# Altium PCB PCB_Program Counter - 1.0_2021-10-28.pcbdoc
Units mm, origin at the board's own origin, x right, y up, seen from the top; angles counter-clockwise.
Board outline 98.04 x 84.07 mm, 2 copper layers (Top Layer, Bottom Layer); 17 components, 31 nets, 75 pads, 11 vias.
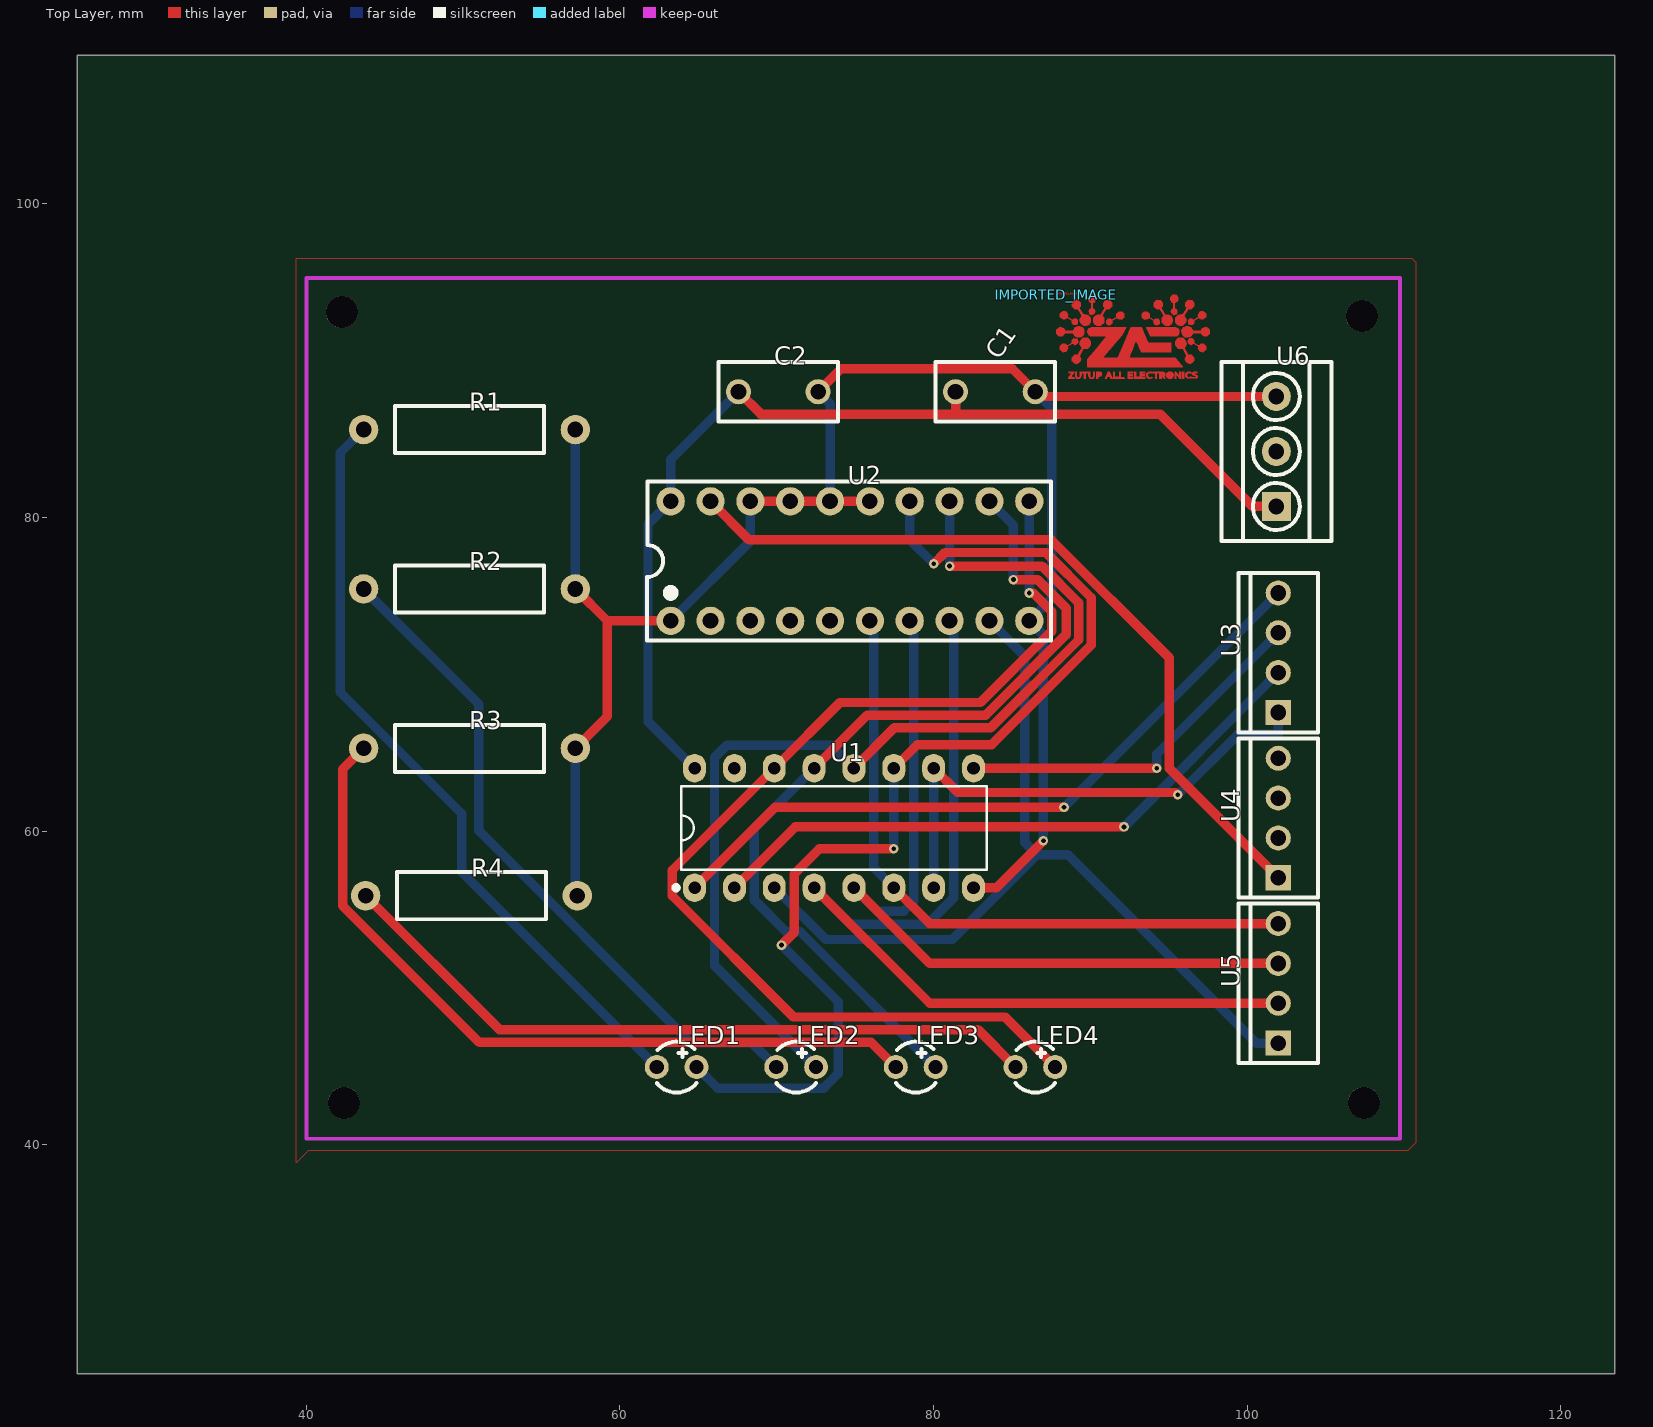
[diagram p0: Top Layer view]
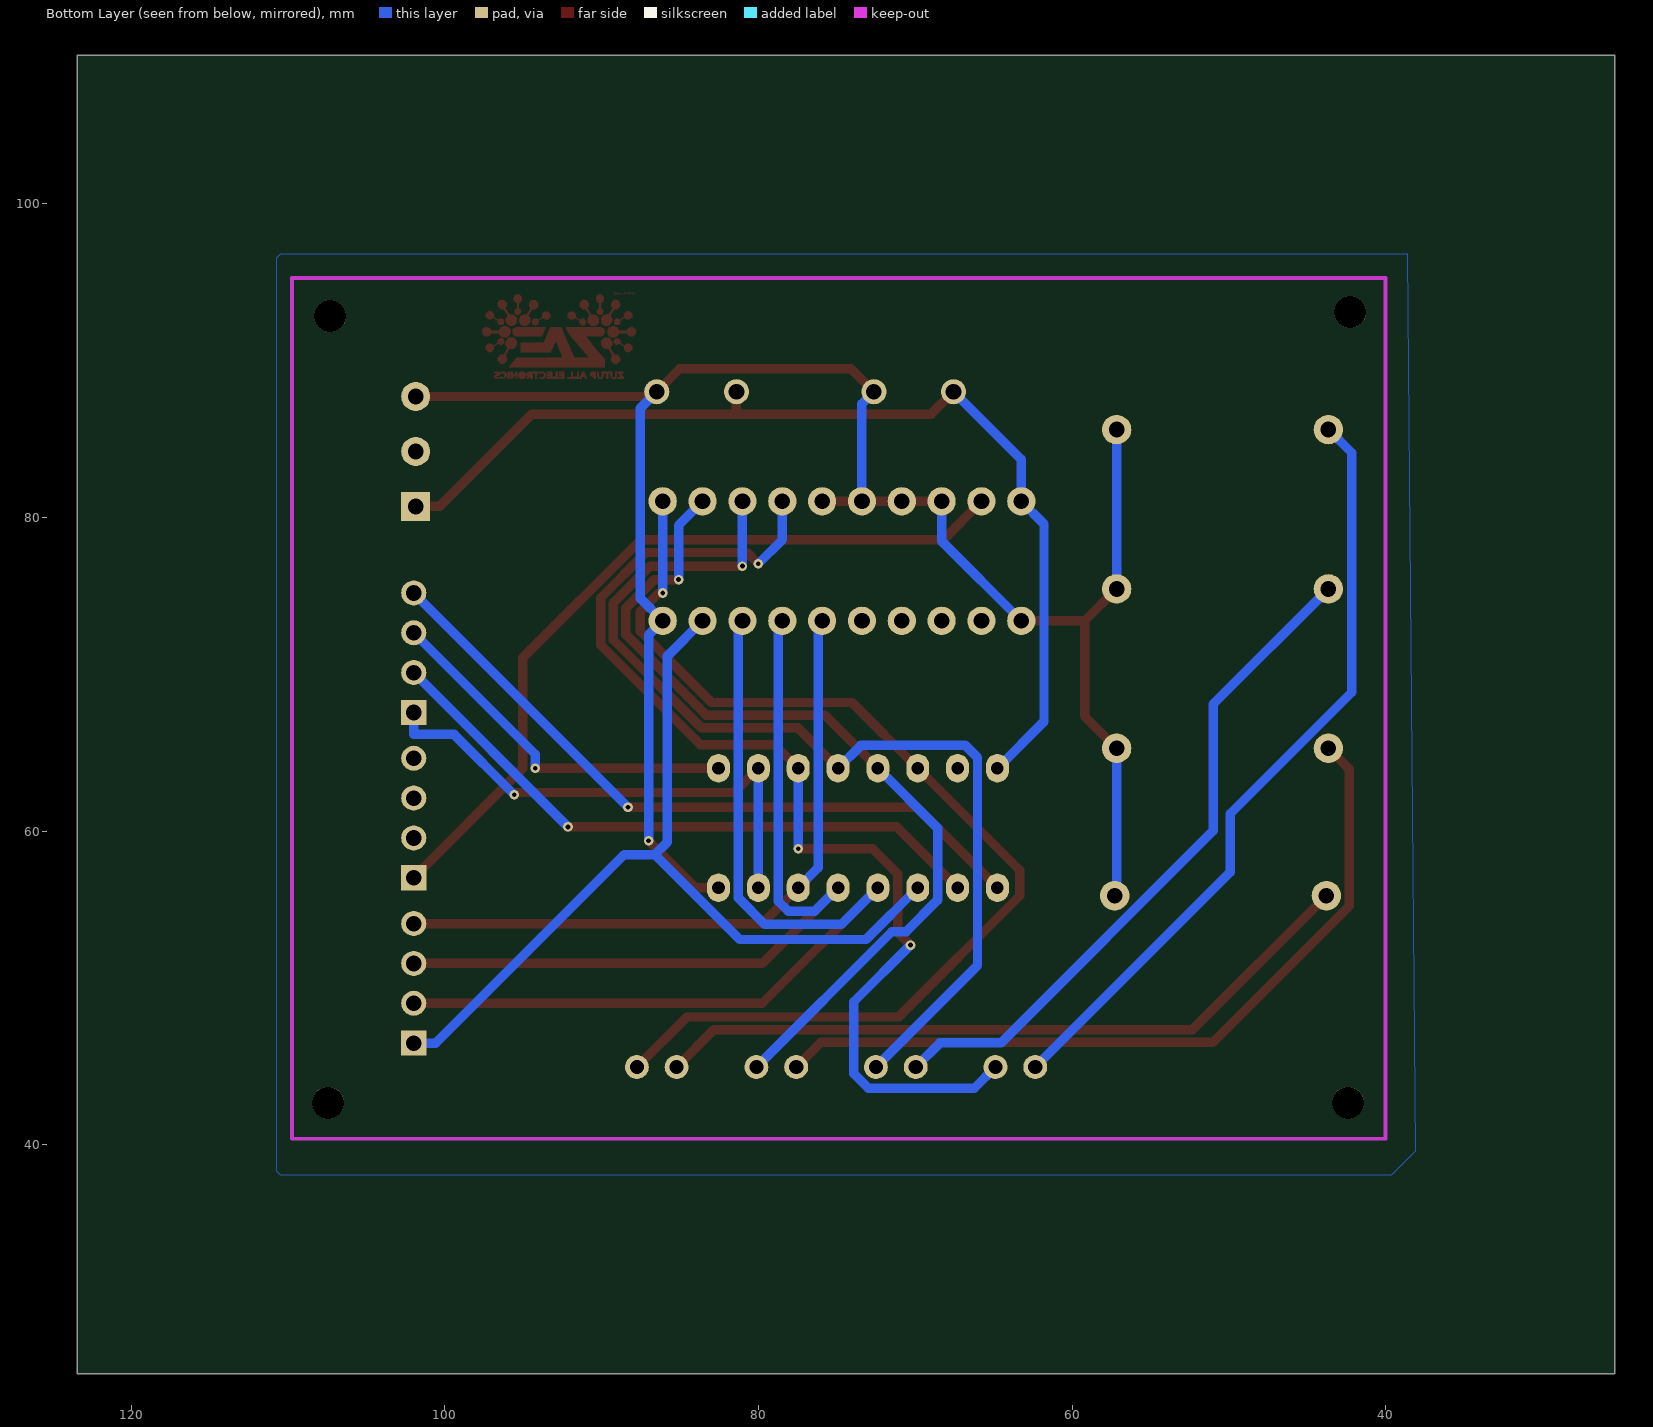
[diagram p1: Bottom Layer view, seen from below]

## Layer stack, top to bottom
Top Layer: signal copper (thickness not stored)
Dielectric: dielectric 0.32, FR-4, Dk 4.8
Bottom Layer: signal copper (thickness not stored)

## Board outline
123.444,25.4 25.4,25.4 25.4,109.474 123.444,109.474

## Components (designator, comment, footprint, x,y, rotation, side; value= is the part's Value field where it differs from the comment)
C1 "100nF 63V" CAP-TH_L7.6-W3.8-P5.08-D0.51 83.947,88.011 r0 top
C2 "100nF 63V" CAP-TH_L7.6-W3.8-P5.08-D0.51 70.104,88.011 r0 top
IMPORTED_IMAGE "IMPORTED_IMAGE" IMPORTED_IMAGE 87.822,94.177 r0 top
LED1 "VERDE" LED-TH_BD3.0-P2.54-RD-GREEN 63.627,44.958 r0 top
LED2 "VERDE" LED-TH_BD3.0-P2.54-RD-GREEN 71.247,44.958 r0 top
LED3 "VERDE" LED-TH_BD3.0-P2.54-RD-GREEN 78.867,44.958 r0 top
LED4 "VERDE" LED-TH_BD3.0-P2.54-RD-GREEN 86.487,44.958 r0 top
R1 "470" RES-TH_BD3.0-L9.5-P13.50-D0.6 50.419,85.598 r0 top
R2 "470" RES-TH_BD3.0-L9.5-P13.50-D0.6 50.419,75.438 r0 top
R3 "470" RES-TH_BD3.0-L9.5-P13.50-D0.6 50.419,65.278 r0 top
R4 "470" RES-TH_BD3.0-L9.5-P13.50-D0.6 50.546,55.88 r0 top
U1 "XD74LS161" DIP-16_L19.2-W6.6-P2.54-LS7.6-BL 73.66,60.198 r0 top
U2 "SN74LS245N" DIP-20_L25.5-W10.0-P2.54-LS7.6-BL 74.676,77.216 r0 top
U3 "SINAIS IN" HDR-TH_4P-P2.54-D1.0 101.981,71.374 r90 top
U4 "171825-4" HDR-TH_4P-P2.54-D1.0 101.981,60.833 r90 top
U5 "BUS" HDR-TH_4P-P2.54-D1.0 101.981,50.292 r90 top
U6 "GS012-3.5-3P" H3-3.5-11.5X7.0MM 101.854,84.201 r0 top

## Footprints (in the part's own frame and the unit in brackets; to place one, negate y for a bottom-side part, rotate by r counter-clockwise, add the part's x,y. Pads: shape width x height; smd on the part's side, far side on the other; paste and mask are expansions set on the pad)
CAP-TH_L7.6-W3.8-P5.08-D0.51 [mm]
  round 1.6 hole 1: 1(-2.54,0) 2(2.54,0)
  silkscreen extent -3.81,-1.91 3.81,1.91
DIP-16_L19.2-W6.6-P2.54-LS7.6-BL [mm]
  oval 1.46x1.825 hole 0.8: 1(-8.89,-3.81) 2(-6.35,-3.81) 3(-3.81,-3.81) 4(-1.27,-3.81) 5(1.27,-3.81) 6(3.81,-3.81) 7(6.35,-3.81) 8(8.89,-3.81) 9(8.89,3.81) 10(6.35,3.81) 11(3.81,3.81) 12(1.27,3.81) 13(-1.27,3.81) 14(-3.81,3.81) 15(-6.35,3.81) 16(-8.89,3.81)
  silkscreen extent -10.22,-3.96 9.73,2.67
DIP-20_L25.5-W10.0-P2.54-LS7.6-BL [mm]
  round 1.8 hole 1: 1(-11.43,-3.81) 2(-8.89,-3.81) 3(-6.35,-3.81) 4(-3.81,-3.81) 5(-1.27,-3.81) 6(1.27,-3.81) 7(3.81,-3.81) 8(6.35,-3.81) 9(8.89,-3.81) 10(11.43,-3.81) 11(11.43,3.81) 12(8.89,3.81) 13(6.35,3.81) 14(3.81,3.81) 15(1.27,3.81) 16(-1.27,3.81) 17(-3.81,3.81) 18(-6.35,3.81) 19(-8.89,3.81) 20(-11.43,3.81)
  silkscreen extent -12.95,-5.08 12.83,5.08
H3-3.5-11.5X7.0MM [mil]
  rect 72.8x72.8 hole 39.4: 1(0,-138)
  round 72.8 hole 39.4: 2(0,0) 3(0,138)
  silkscreen extent -138,-225 138,225
HDR-TH_4P-P2.54-D1.0 [mm]
  rect 1.6x1.6 hole 1: 1(-3.81,0)
  round 1.6 hole 1: 2(-1.27,0) 3(1.27,0) 4(3.81,0)
  silkscreen extent -5.08,-2.54 5.08,2.54
IMPORTED_IMAGE [mm]
  Top Layer region: 1.168,-5.287 1.183,-5.331 0.762,-5.331 0.762,-5.297 0.762,-5.293 0.764,-5.288 0.766,-5.282 0.77,-5.275 0.774,-5.267 0.779,-5.258 0.785,-5.249 0.792,-5.239 0.799,-5.228 0.807,-5.217 0.816,-5.206 0.825,-5.194 0.835,-5.182 0.844,-5.17 0.855,-5.158 0.865,-5.146 0.888,-5.12 0.907,-5.097 0.923,-5.077 0.937,-5.06 0.948,-5.045 0.955,-5.031 0.961,-5.02 0.963,-5.011 0.962,-5.004 0.959,-4.998 0.953,-4.993 0.944,-4.99 0.933,-4.987 0.919,-4.986 0.902,-4.985 0.883,-4.985 0.796,-4.985 0.796,-4.881 1.142,-4.881 1.142,-4.93 1.142,-4.936 1.141,-4.942 1.138,-4.949 1.135,-4.957 1.132,-4.966 1.127,-4.975 1.122,-4.985 1.117,-4.995 1.111,-5.005 1.104,-5.016 1.097,-5.027 1.089,-5.038 1.081,-5.049 1.073,-5.06 1.065,-5.071 1.056,-5.082 1.037,-5.105 1.02,-5.125 1.006,-5.143 0.995,-5.158 0.986,-5.171 0.98,-5.183 0.977,-5.193 0.976,-5.201 0.977,-5.208 0.981,-5.213 0.988,-5.218 0.998,-5.222 1.01,-5.225 1.024,-5.228 1.042,-5.231 1.062,-5.233 1.154,-5.244
  Top Layer region: 2.561,-5.331 2.561,-4.881 2.663,-4.881 2.687,-4.881 2.711,-4.882 2.732,-4.884 2.753,-4.887 2.772,-4.89 2.79,-4.894 2.806,-4.899 2.822,-4.906 2.836,-4.912 2.849,-4.92 2.862,-4.929 2.873,-4.939 2.883,-4.95 2.893,-4.962 2.902,-4.975 2.91,-4.989 2.945,-5.054 2.874,-5.187 2.769,-5.209 2.665,-5.232 2.665,-5.331 hole: 904787.686,891109.527 904787.686,890391.723 904787.686,890391.723 905991.392,890623.625 905991.392,890623.625 906223.04,891827.077 906223.04,891827.077 904787.686,891827.077 904787.686,891827.077 904787.686,891109.527
  Top Layer region: 1.869,-5.158 1.869,-5.331 1.765,-5.331 1.765,-4.985 1.636,-4.985 1.616,-5.109 1.611,-5.135 1.605,-5.161 1.598,-5.186 1.59,-5.211 1.581,-5.233 1.572,-5.253 1.564,-5.27 1.555,-5.282 1.515,-5.331 1.283,-5.331 1.212,-5.197 1.212,-4.881 1.315,-4.881 1.315,-5.184 1.416,-5.267 1.452,-5.245 1.488,-5.223 1.488,-4.881 2.008,-4.881 2.008,-4.985 1.869,-4.985
  Top Layer region: 6.715,-5.279 6.715,-5.331 6.577,-5.331 6.577,-4.881 6.824,-4.881 6.958,-4.952 6.958,-5.154 6.882,-5.2 6.92,-5.238 6.935,-5.254 6.947,-5.272 6.955,-5.289 6.958,-5.303 6.957,-5.311 6.953,-5.318 6.949,-5.323 6.942,-5.327 6.935,-5.329 6.926,-5.33 6.916,-5.33 6.905,-5.329 6.894,-5.327 6.883,-5.323 6.871,-5.318 6.86,-5.312 6.849,-5.305 6.838,-5.297 6.828,-5.289 6.819,-5.279 6.8,-5.259 6.78,-5.242 6.761,-5.231 6.746,-5.227 6.715,-5.227 hole: 945287.224,891134.927 945287.224,890391.723 945287.224,890391.723 945892.76,890508.563 945892.76,890508.563 946498.55,890625.149 946498.55,890625.149 946498.55,891644.705 946498.55,891644.705 945287.224,891877.877 945287.224,891877.877 945287.224,891134.927
  Top Layer region: 5.296,-5.279 5.296,-5.331 4.985,-5.331 4.985,-4.881 5.088,-4.881 5.088,-5.227 5.296,-5.227
  Top Layer region: 2.422,-5.264 2.386,-5.331 2.15,-5.331 2.096,-5.254 2.042,-5.177 2.042,-4.881 2.181,-4.881 2.181,-5.223 2.253,-5.267 2.354,-5.184 2.354,-4.881 2.458,-4.881 2.458,-5.197
  Top Layer region: 7.961,-5.106 7.961,-5.331 7.863,-5.331 7.65,-5.073 7.65,-5.331 7.546,-5.331 7.546,-4.881 7.633,-4.881 7.744,-5.011 7.855,-5.14 7.856,-5.011 7.858,-4.881 7.961,-4.881
  Top Layer region: 3.635,-5.331 3.635,-4.881 3.738,-4.881 3.738,-5.227 3.981,-5.227 3.981,-5.331
  Top Layer region: 7.136,-5.331 7.027,-5.222 7.027,-5.007 7.084,-4.944 7.141,-4.881 7.362,-4.881 7.416,-4.941 7.432,-4.96 7.446,-4.981 7.457,-5.002 7.467,-5.023 7.474,-5.046 7.48,-5.068 7.483,-5.091 7.484,-5.114 7.484,-5.137 7.481,-5.159 7.477,-5.181 7.47,-5.202 7.461,-5.222 7.45,-5.242 7.437,-5.26 7.422,-5.276 7.368,-5.331 hole: 949957.014,889536.759 950574.996,889084.893 950574.996,889084.893 951240.222,889440.747 951240.222,889440.747 951905.448,889796.855 951905.448,889796.855 951798.26,890725.479 951798.26,890725.479 951690.818,891654.103 951690.818,891654.103 950751.018,891762.561 950751.018,891762.561 949811.218,891870.765 949811.218,891870.765 949338.778,889988.625 949338.778,889988.625 949957.014,889536.759
  Top Layer region: 5.873,-5.331 5.809,-5.273 5.746,-5.216 5.746,-4.988 5.823,-4.935 5.9,-4.881 6.078,-4.881 6.161,-4.964 6.161,-4.881 6.542,-4.881 6.542,-4.985 6.404,-4.985 6.404,-5.331 6.3,-5.331 6.3,-4.991 5.889,-4.991 5.848,-5.098 5.887,-5.22 5.997,-5.263 6.037,-5.229 6.077,-5.196 6.179,-5.261 6.127,-5.296 6.114,-5.302 6.099,-5.309 6.081,-5.315 6.06,-5.32 6.039,-5.324 6.017,-5.327 5.995,-5.329 5.974,-5.33
  Top Layer region: 8.031,-5.331 8.031,-4.881 8.169,-4.881 8.169,-5.331
  Top Layer region: 5.331,-5.331 5.331,-4.881 5.677,-4.881 5.677,-4.985 5.469,-4.985 5.469,-5.054 5.683,-5.054 5.668,-5.097 5.654,-5.14 5.562,-5.151 5.469,-5.162 5.469,-5.227 5.677,-5.227 5.677,-5.331
  Top Layer region: 3.108,-5.331 3.131,-5.275 3.168,-5.188 3.213,-5.081 3.298,-4.881 3.414,-4.881 3.516,-5.119 3.594,-5.304 3.606,-5.331 3.461,-5.331 3.461,-5.227 3.261,-5.227 3.221,-5.331 hole: 911364.508,890615.751 911364.508,890096.321 911364.508,890096.321 912056.912,890096.321 912056.912,890096.321 912056.912,891134.927 912056.912,891134.927 911364.508,891134.927 911364.508,891134.927 911364.508,890615.751
  Top Layer region: 4.915,-5.279 4.915,-5.331 4.569,-5.331 4.569,-4.881 4.915,-4.881 4.915,-4.985 4.673,-4.985 4.673,-5.054 4.881,-5.054 4.881,-5.158 4.673,-5.158 4.673,-5.227 4.915,-5.227
  Top Layer region: 4.015,-5.331 4.015,-4.881 4.119,-4.881 4.119,-5.222 4.339,-5.244 4.367,-5.331
  Top Layer region: 9.002,-5.276 8.961,-5.325 8.34,-5.323 8.238,-5.222 8.238,-5.007 8.296,-4.944 8.353,-4.881 8.576,-4.881 8.653,-4.974 8.611,-5.016 8.404,-4.974 8.374,-5.023 8.368,-5.034 8.362,-5.046 8.357,-5.06 8.352,-5.074 8.348,-5.089 8.345,-5.104 8.343,-5.118 8.343,-5.13 8.342,-5.19 8.485,-5.266 8.574,-5.193 8.598,-5.217 8.601,-5.219 8.605,-5.222 8.611,-5.224 8.618,-5.227 8.626,-5.229 8.634,-5.231 8.644,-5.234 8.655,-5.236 8.666,-5.238 8.678,-5.24 8.691,-5.242 8.704,-5.243 8.717,-5.245 8.731,-5.246 8.745,-5.247 8.759,-5.248 8.896,-5.255 8.931,-5.198 8.813,-5.159 8.694,-5.12 8.675,-5.069 8.656,-5.019 8.696,-4.915 8.776,-4.895 8.793,-4.891 8.812,-4.888 8.831,-4.885 8.85,-4.884 8.869,-4.883 8.887,-4.883 8.903,-4.884 8.916,-4.886 8.977,-4.898 8.991,-4.941 9.006,-4.985 8.792,-4.985 8.792,-5.012 8.794,-5.018 8.8,-5.025 8.81,-5.033 8.823,-5.042 8.838,-5.051 8.856,-5.06 8.875,-5.069 8.896,-5.078 9,-5.117 9.042,-5.228
  Top Layer region: 1.973,-4.604 1.975,-4.102 2.579,-3.392 2.7,-3.249 2.813,-3.115 2.916,-2.992 3.005,-2.883 3.079,-2.793 3.135,-2.723 3.171,-2.676 3.183,-2.657 3.185,-2.631 2.158,-2.631 2.087,-2.553 2.072,-2.536 2.057,-2.517 2.043,-2.496 2.03,-2.475 2.018,-2.455 2.007,-2.435 1.999,-2.416 1.993,-2.399 1.969,-2.323 2.025,-2.215 2.081,-2.108 2.157,-2.077 2.233,-2.047 3.349,-2.044 3.573,-2.044 3.782,-2.045 3.972,-2.046 4.137,-2.048 4.274,-2.051 4.377,-2.054 4.443,-2.057 4.465,-2.06 4.464,-2.066 4.459,-2.078 4.452,-2.095 4.442,-2.116 4.43,-2.142 4.415,-2.172 4.399,-2.205 4.382,-2.241 4.363,-2.279 4.343,-2.319 4.329,-2.346 4.192,-2.613 3.585,-3.298 3.462,-3.436 3.349,-3.566 3.245,-3.684 3.155,-3.787 3.081,-3.873 3.025,-3.939 2.989,-3.982 2.977,-3.999 2.979,-4.001 2.987,-4.003 2.998,-4.004 3.014,-4.006 3.035,-4.007 3.059,-4.008 3.086,-4.01 3.117,-4.011 3.151,-4.012 3.188,-4.013 3.227,-4.013 3.269,-4.014 3.312,-4.015 3.358,-4.015 3.405,-4.015 3.454,-4.015 3.931,-4.015 4.345,-3.029 4.76,-2.043 5.107,-2.043 5.454,-2.042 5.661,-2.536 5.868,-3.029 7.338,-3.047 7.338,-3.635 5.411,-3.635 5.261,-3.288 5.231,-3.219 5.201,-3.154 5.174,-3.095 5.149,-3.044 5.127,-3.002 5.108,-2.97 5.095,-2.949 5.087,-2.942 5.079,-2.954 5.063,-2.986 5.041,-3.035 5.014,-3.1 4.982,-3.177 4.947,-3.263 4.91,-3.355 4.872,-3.451 4.835,-3.547 4.799,-3.642 4.765,-3.731 4.735,-3.812 4.709,-3.882 4.69,-3.938 4.677,-3.978 4.673,-3.999 4.679,-4 4.696,-4.002 4.724,-4.003 4.768,-4.005 4.826,-4.006 4.895,-4.008 4.975,-4.009 5.066,-4.01 5.167,-4.011 5.277,-4.012 5.395,-4.013 5.52,-4.014 5.652,-4.014 5.79,-4.015 5.915,-4.015 6.043,-4.015 6.137,-4.015 7.601,-4.015 7.833,-4.281 7.88,-4.335 7.923,-4.386 7.963,-4.434 7.997,-4.477 8.025,-4.514 8.047,-4.543 8.06,-4.564 8.065,-4.575 8.065,-4.604
  Top Layer region: 1.312,-4.4 1.236,-4.377 1.219,-4.37 1.2,-4.362 1.18,-4.351 1.159,-4.339 1.138,-4.326 1.118,-4.312 1.099,-4.297 1.082,-4.282 1.004,-4.211 1.004,-3.99 1.076,-3.899 1.147,-3.808 1.381,-3.808 1.5,-3.596 1.619,-3.384 1.55,-3.266 1.481,-3.149 1.525,-2.915 1.706,-2.735 2.013,-2.735 2.114,-2.836 2.215,-2.937 2.215,-3.218 2.116,-3.329 2.017,-3.44 1.725,-3.447 1.613,-3.657 1.502,-3.866 1.603,-4.08 1.558,-4.188 1.513,-4.295 1.413,-4.348
  Top Layer region: 8.48,-4.398 8.381,-4.347 8.283,-4.295 8.238,-4.188 8.193,-4.08 8.244,-3.972 8.295,-3.864 8.061,-3.443 7.781,-3.443 7.581,-3.218 7.581,-2.937 7.682,-2.836 7.783,-2.735 8.09,-2.735 8.269,-2.913 8.291,-3.015 8.314,-3.118 8.247,-3.253 8.179,-3.389 8.297,-3.598 8.415,-3.808 8.649,-3.808 8.72,-3.899 8.792,-3.99 8.792,-4.179 8.723,-4.266 8.655,-4.354 8.567,-4.376
  Top Layer region: 0.425,-3.635 0.334,-3.563 0.242,-3.491 0.242,-3.276 0.393,-3.115 0.573,-3.115 0.715,-3.215 0.859,-3.128 1.004,-3.042 1.004,-2.878 1.06,-2.822 1.116,-2.765 1.224,-2.776 1.332,-2.787 1.425,-2.981 1.317,-3.145 1.179,-3.188 1.106,-3.149 1.032,-3.109 0.88,-3.19 0.728,-3.271 0.765,-3.389 0.713,-3.49 0.66,-3.592 0.604,-3.613 0.592,-3.617 0.578,-3.621 0.562,-3.625 0.546,-3.628 0.53,-3.631 0.515,-3.633 0.5,-3.634 0.486,-3.635
  Top Layer region: 9.462,-3.563 9.371,-3.635 9.31,-3.635 9.296,-3.634 9.281,-3.633 9.265,-3.631 9.249,-3.628 9.234,-3.625 9.218,-3.621 9.204,-3.617 9.192,-3.613 9.136,-3.592 9.083,-3.49 9.031,-3.389 9.05,-3.33 9.068,-3.271 8.916,-3.19 8.764,-3.109 8.69,-3.149 8.616,-3.188 8.548,-3.167 8.479,-3.145 8.427,-3.066 8.375,-2.987 8.399,-2.921 8.404,-2.907 8.41,-2.892 8.418,-2.877 8.425,-2.862 8.433,-2.848 8.441,-2.834 8.448,-2.822 8.456,-2.812 8.489,-2.769 8.683,-2.769 8.738,-2.824 8.792,-2.878 8.792,-3.042 8.937,-3.128 9.081,-3.215 9.152,-3.165 9.223,-3.115 9.393,-3.115 9.554,-3.266 9.554,-3.491
  Top Layer region: 1.311,-2.7 1.178,-2.629 1.124,-2.526 1.071,-2.423 0.584,-2.423 0.497,-2.527 0.409,-2.631 0.17,-2.631 0,-2.461 0,-2.222 0.22,-2.036 0.324,-2.057 0.428,-2.078 0.491,-2.135 0.515,-2.16 0.535,-2.188 0.549,-2.215 0.554,-2.238 0.554,-2.285 1.071,-2.285 1.126,-2.178 1.181,-2.072 1.304,-2.018 1.327,-2.008 1.348,-2 1.357,-1.996 1.366,-1.993 1.374,-1.99 1.382,-1.987 1.39,-1.985 1.398,-1.983 1.405,-1.981 1.412,-1.98 1.418,-1.979 1.425,-1.978 1.432,-1.978 1.438,-1.978 1.445,-1.979 1.452,-1.979 1.459,-1.981 1.466,-1.982 1.473,-1.984 1.481,-1.986 1.489,-1.989 1.497,-1.992 1.506,-1.995 1.525,-2.002 1.547,-2.011 1.572,-2.021 1.687,-2.07 1.8,-2.231 1.8,-2.426 1.748,-2.528 1.695,-2.629 1.629,-2.664 1.562,-2.7
  Top Layer region: 8.552,-2.664 8.485,-2.7 8.208,-2.7 8.026,-2.544 8.007,-2.398 7.987,-2.251 8.046,-2.161 8.105,-2.071 8.228,-2.018 8.251,-2.008 8.271,-2 8.28,-1.996 8.289,-1.993 8.298,-1.99 8.306,-1.987 8.313,-1.985 8.321,-1.983 8.328,-1.981 8.335,-1.98 8.342,-1.979 8.348,-1.978 8.355,-1.978 8.362,-1.978 8.368,-1.979 8.375,-1.98 8.382,-1.981 8.389,-1.982 8.397,-1.984 8.404,-1.986 8.413,-1.989 8.421,-1.992 8.43,-1.995 8.45,-2.003 8.472,-2.012 8.497,-2.022 8.614,-2.071 8.67,-2.178 8.725,-2.285 9.242,-2.285 9.242,-2.238 9.243,-2.228 9.247,-2.215 9.253,-2.202 9.261,-2.188 9.27,-2.174 9.281,-2.16 9.292,-2.147 9.305,-2.135 9.368,-2.078 9.472,-2.057 9.576,-2.036 9.686,-2.129 9.796,-2.222 9.796,-2.461 9.626,-2.631 9.394,-2.631 9.318,-2.56 9.288,-2.53 9.264,-2.501 9.248,-2.475 9.242,-2.456 9.242,-2.423 8.725,-2.423 8.618,-2.629
  Top Layer region: 7.782,-2.551 7.707,-2.631 5.99,-2.631 5.868,-2.366 5.844,-2.313 5.821,-2.261 5.8,-2.214 5.782,-2.171 5.767,-2.134 5.756,-2.104 5.749,-2.083 5.746,-2.072 5.746,-2.042 7.619,-2.042 7.717,-2.093 7.815,-2.144 7.836,-2.2 7.84,-2.213 7.844,-2.23 7.848,-2.249 7.851,-2.271 7.854,-2.294 7.856,-2.317 7.857,-2.34 7.858,-2.363 7.858,-2.471
  Top Layer region: 7.083,-1.972 7.06,-1.973 6.959,-1.973 6.846,-1.872 6.733,-1.771 6.733,-1.461 6.85,-1.331 6.723,-1.115 6.596,-0.9 6.413,-0.9 6.231,-0.757 6.231,-0.481 6.409,-0.303 6.663,-0.344 6.784,-0.492 6.784,-0.748 6.707,-0.825 6.939,-1.246 7.162,-1.246 7.253,-1.288 7.344,-1.329 7.442,-1.52 7.442,-1.7 7.344,-1.89 7.253,-1.932 7.232,-1.94 7.21,-1.948 7.185,-1.955 7.159,-1.961 7.133,-1.966 7.107,-1.97
  Top Layer region: 2.736,-1.973 2.713,-1.972 2.689,-1.97 2.663,-1.966 2.637,-1.961 2.611,-1.955 2.586,-1.948 2.564,-1.94 2.543,-1.932 2.452,-1.89 2.403,-1.795 2.393,-1.773 2.383,-1.751 2.375,-1.729 2.369,-1.707 2.364,-1.684 2.36,-1.662 2.357,-1.639 2.356,-1.617 2.356,-1.594 2.358,-1.572 2.361,-1.549 2.365,-1.526 2.37,-1.504 2.377,-1.481 2.386,-1.458 2.395,-1.436 2.436,-1.345 2.627,-1.246 2.856,-1.245 2.972,-1.034 3.087,-0.824 3.049,-0.786 3.011,-0.748 3.011,-0.515 3.085,-0.377 3.161,-0.346 3.178,-0.34 3.196,-0.334 3.217,-0.329 3.238,-0.324 3.259,-0.32 3.279,-0.317 3.298,-0.315 3.316,-0.314 3.395,-0.312 3.565,-0.481 3.565,-0.757 3.474,-0.828 3.383,-0.9 3.2,-0.9 3.073,-1.115 2.946,-1.331 3.004,-1.396 3.063,-1.461 3.063,-1.771 2.837,-1.973
  Top Layer region: 8.17,-1.874 8.071,-1.973 7.853,-1.973 7.777,-1.934 7.761,-1.925 7.743,-1.914 7.725,-1.9 7.706,-1.885 7.688,-1.87 7.671,-1.854 7.656,-1.838 7.642,-1.822 7.582,-1.748 7.581,-1.606 7.581,-1.464 7.664,-1.374 7.748,-1.284 7.829,-1.266 7.847,-1.262 7.867,-1.258 7.888,-1.254 7.911,-1.251 7.933,-1.247 7.955,-1.244 7.976,-1.241 7.994,-1.239 8.08,-1.229 8.199,-1.028 8.318,-0.827 8.238,-0.748 8.238,-0.481 8.416,-0.303 8.671,-0.344 8.792,-0.492 8.792,-0.73 8.622,-0.9 8.427,-0.9 8.178,-1.321 8.319,-1.578 8.294,-1.676 8.269,-1.774
  Top Layer region: 1.725,-1.973 1.626,-1.874 1.527,-1.774 1.477,-1.578 1.618,-1.321 1.494,-1.111 1.369,-0.9 1.174,-0.9 1.004,-0.73 1.004,-0.622 1.005,-0.599 1.007,-0.575 1.01,-0.55 1.015,-0.526 1.02,-0.503 1.026,-0.481 1.033,-0.462 1.041,-0.446 1.078,-0.377 1.153,-0.346 1.17,-0.34 1.189,-0.334 1.209,-0.329 1.23,-0.324 1.251,-0.32 1.271,-0.317 1.291,-0.315 1.308,-0.314 1.388,-0.312 1.558,-0.481 1.558,-0.748 1.478,-0.827 1.716,-1.229 1.801,-1.239 1.82,-1.241 1.841,-1.244 1.863,-1.247 1.885,-1.251 1.908,-1.254 1.929,-1.258 1.949,-1.262 1.967,-1.266 2.048,-1.284 2.132,-1.374 2.215,-1.464 2.215,-1.606 2.214,-1.748 2.154,-1.822 2.14,-1.838 2.125,-1.854 2.108,-1.87 2.09,-1.885 2.071,-1.9 2.053,-1.914 2.035,-1.925 2.019,-1.934 1.943,-1.973
  Top Layer region: 6.442,-1.944 6.37,-1.921 6.298,-1.899 6.188,-1.731 6.223,-1.64 6.072,-1.56 5.92,-1.479 5.82,-1.562 5.607,-1.568 5.538,-1.506 5.469,-1.443 5.469,-1.2 5.526,-1.136 5.584,-1.073 5.815,-1.073 5.885,-1.142 5.954,-1.212 5.954,-1.415 6.1,-1.503 6.247,-1.59 6.314,-1.523 6.503,-1.523 6.557,-1.577 6.611,-1.632 6.611,-1.833 6.527,-1.889
  Top Layer region: 3.377,-1.935 3.362,-1.933 3.347,-1.93 3.332,-1.925 3.316,-1.918 3.299,-1.909 3.281,-1.898 3.261,-1.885 3.185,-1.831 3.185,-1.632 3.293,-1.523 3.482,-1.523 3.548,-1.587 3.842,-1.412 3.842,-1.212 3.981,-1.073 4.2,-1.073 4.327,-1.188 4.327,-1.443 4.258,-1.506 4.189,-1.568 3.976,-1.562 3.876,-1.479 3.721,-1.561 3.566,-1.644 3.604,-1.764 3.517,-1.851 3.499,-1.869 3.481,-1.885 3.465,-1.898 3.449,-1.91 3.434,-1.919 3.42,-1.926 3.405,-1.931 3.391,-1.934
  Top Layer region: 1.082,-1.904 0.995,-1.8 0.995,-1.638 0.85,-1.551 0.705,-1.463 0.64,-1.51 0.575,-1.558 0.425,-1.558 0.334,-1.486 0.242,-1.414 0.242,-1.182 0.334,-1.11 0.425,-1.038 0.486,-1.038 0.5,-1.039 0.515,-1.04 0.53,-1.042 0.546,-1.045 0.562,-1.048 0.578,-1.052 0.592,-1.056 0.604,-1.06 0.66,-1.081 0.765,-1.284 0.746,-1.343 0.727,-1.403 1.021,-1.579 1.112,-1.527 1.204,-1.475 1.385,-1.594 1.385,-1.821 1.301,-1.904
  Top Layer region: 8.494,-1.904 8.411,-1.821 8.411,-1.594 8.592,-1.475 8.684,-1.527 8.775,-1.579 8.922,-1.491 9.069,-1.403 9.031,-1.284 9.084,-1.182 9.095,-1.161 9.108,-1.141 9.121,-1.122 9.134,-1.104 9.147,-1.089 9.16,-1.077 9.171,-1.067 9.181,-1.062 9.191,-1.058 9.204,-1.055 9.218,-1.051 9.233,-1.048 9.25,-1.046 9.266,-1.044 9.282,-1.042 9.298,-1.041 9.371,-1.038 9.462,-1.11 9.554,-1.182 9.554,-1.414 9.371,-1.558 9.221,-1.558 9.157,-1.511 9.093,-1.464 8.947,-1.546 8.801,-1.628 8.801,-1.8 8.714,-1.904
  Top Layer region: 2.294,-1.283 2.113,-1.214 2.092,-1.129 2.071,-1.043 2.115,-0.904 2.25,-0.861 2.25,-0.485 2.203,-0.485 2.193,-0.483 2.18,-0.479 2.167,-0.473 2.152,-0.464 2.137,-0.454 2.122,-0.442 2.107,-0.429 2.094,-0.415 2.031,-0.345 2.031,-0.139 2.094,-0.07 2.157,0 2.388,0 2.527,-0.138 2.527,-0.331 2.419,-0.485 2.319,-0.485 2.319,-0.865 2.353,-0.865 2.361,-0.867 2.371,-0.872 2.381,-0.88 2.393,-0.89 2.406,-0.903 2.418,-0.917 2.431,-0.933 2.442,-0.95 2.498,-1.035 2.475,-1.107 2.452,-1.179
  Top Layer region: 7.502,-1.283 7.423,-1.231 7.344,-1.179 7.298,-1.035 7.354,-0.95 7.378,-0.917 7.403,-0.89 7.425,-0.872 7.443,-0.865 7.477,-0.865 7.477,-0.485 7.377,-0.485 7.323,-0.408 7.269,-0.331 7.269,-0.138 7.338,-0.069 7.408,0 7.639,0 7.765,-0.139 7.765,-0.345 7.702,-0.415 7.674,-0.442 7.644,-0.464 7.616,-0.479 7.593,-0.485 7.546,-0.485 7.546,-0.861 7.684,-0.905 7.725,-1.068 7.702,-1.142 7.679,-1.215
LED-TH_BD3.0-P2.54-RD-GREEN [mil]
  round 60 hole 35.43: 1(-50,0) 2(50,0)
  silkscreen extent -50,-64 50,64
RES-TH_BD3.0-L9.5-P13.50-D0.6 [mm]
  round 1.88 hole 1: 1(-6.75,0) 2(6.75,0)
  silkscreen extent -4.75,-1.5 4.75,1.5

## Free pads (board coordinates)
  round 2.032 hole 2.032 unplated: ""(42.291,93.091) ""(42.418,42.672) ""(107.315,92.837) ""(107.442,42.672)

## Via types
v1: diameter 0.61, hole 0.305, Top Layer to Bottom Layer, 11 vias

## Nets (pads, with @x,y where several pads share a name; then routed paths per layer and width w, separated by ;. In a path a pad name is that pad's centre, name@x,y a point inside that pad or via, vN(x,y) a via of type N, cw(c..) or ccw(c..) an arc to the next point about the centre after c; other vN are vias at no path point)
+5V: C1.1 C2.1 U1.16 U2.20 U6.1 | length 66.4
  Top Layer w0.6: C2.1 68.994,86.581 81.407,86.581 ; C1.1 81.407,86.581 ; U6.1 100.328,80.696 94.443,86.581 81.407,86.581
  Bottom Layer w0.6: U1.16 61.798,66.98 61.798,79.578 U2.20 63.246,83.693 C2.1
GND: C1.2 C2.2 R1.2 R2.2 R3.2 R4.2 U1.8 U2.1 U2.10 U2.15 U2.16 U2.17 U2.18 U6.3 | length 126.4
  Top Layer w0.6: R3.2@57.169,65.278 59.201,67.31 59.201,73.406 ; R2.2@57.169,75.438 59.201,73.406 ; U2.1 59.201,73.406 ; U2.18 U2.17 U2.16 U2.15 ; C2.2 74.11,89.477 85.021,89.477 C1.2 86.792,87.706 U6.3 ; U1.8 84.013,56.388 v1(87.01,59.385)
  Bottom Layer w0.6: R3.2@57.169,65.278 57.169,56.007 R4.2@57.296,55.88 ; R2.2@57.169,75.438 R1.2@57.169,85.598 ; U2.1 68.326,78.486 U2.18 ; C2.2 73.406,87.249 U2.16 ; C1.2 87.53,86.968 87.53,74.83 U2.10 87.01,72.502 v1(87.01,59.385)
LED1_1: LED1.1 R1.1 | length 49.6
  Bottom Layer w0.6: R1.1 42.185,84.114 42.185,68.856 49.931,61.111 49.931,57.384 LED1.1
LED2_1: LED2.1 R2.1 | length 43.7
  Bottom Layer w0.6: R2.1 51.018,68.089 51.018,60.024 64.542,46.5 68.435,46.5 LED2.1
LED3_1: LED3.1 R3.1 | length 50.1
  Top Layer w0.6: R3.1 42.33,63.939 42.33,55.246 51.034,46.542 76.013,46.542 LED3.1
LED4_1: LED4.1 R4.1 | length 45.9
  Top Layer w0.6: R4.1 52.331,47.345 82.83,47.345 LED4.1
S$31: 
S$33: 
S$35: 
U1_1: U1.1 U3.4 | length 45
  Top Layer w0.6: U1.1 69.904,61.522 v1(88.319,61.522)
  Bottom Layer w0.6: v1(88.319,61.522) U3.4
U1_2: U1.2 U3.2 | length 40.4
  Top Layer w0.6: U1.2 71.192,60.27 v1(92.147,60.27)
  Bottom Layer w0.6: v1(92.147,60.27) U3.2
U1_3: U1.3 U2.9 U5.1 | length 56.9
  Bottom Layer w0.6: U1.3 73.147,53.091 81.199,53.091 86.608,58.501 ; U2.9 85.806,71.166 85.806,59.303 86.608,58.501 ; U5.1 100.579,46.482 88.561,58.501 86.608,58.501
U1_4: U1.4 U2.8 U5.2 | length 61
  Top Layer w0.6: U1.4 79.756,49.022 U5.2
  Bottom Layer w0.6: U1.4 74.728,54.05 79.598,54.05 81.28,55.732 81.28,73.152 U2.8
U1_5: U1.5 U2.7 U5.3 | length 51.7
  Top Layer w0.6: U1.5 79.756,51.562 U5.3
  Bottom Layer w0.6: U1.5 76.418,54.9 78.109,54.9 78.74,55.531 78.74,73.152 U2.7
U1_6: U1.6 U2.6 U5.4 | length 43.1
  Top Layer w0.6: U1.6 79.756,54.102 U5.4
  Bottom Layer w0.6: U2.6 76.2,73.152 76.2,57.658 U1.6
U1_7: U1.7 U1.10 U3.1 | length 33.3
  Top Layer w0.6: U1.10 81.559,62.459 95.427,62.459 v1@95.566,62.319
  Bottom Layer w0.6: U1.7 U1.10 ; v1@95.566,62.319 99.409,66.162 101.981,66.162 U3.1
  other v1: 95.566,62.319
U1_9: U1.9 U3.3 | length 23.5
  Top Layer w0.6: U1.9 v1(94.232,64.008)
  Bottom Layer w0.6: v1(94.232,64.008) 94.232,64.895 U3.3
U1_11: LED1.2 U1.11 U2.14 | length 71.7
  Top Layer w0.6: v1(70.312,52.733) 71.12,53.541 71.12,57.27 72.726,58.876 v1(77.47,58.876) ; U1.11 78.97,65.508 83.707,65.508 90.061,71.862 90.061,74.88 87.179,77.762 80.741,77.762 v1(80.015,77.037)
  Bottom Layer w0.6: LED1.2 66.246,43.609 72.992,43.609 73.922,44.539 73.922,49.122 v1(70.312,52.733) ; v1(77.47,58.876) U1.11 ; U2.14 78.486,78.566 v1(80.015,77.037)
U1_12: LED2.2 U1.12 U2.13 | length 65.6
  Top Layer w0.6: U1.12 77.517,66.594 83.657,66.594 89.258,72.195 89.258,74.548 86.914,76.892 v1(81.026,76.892)
  Bottom Layer w0.6: LED2.2 66.04,51.435 66.04,64.694 66.812,65.465 73.473,65.465 U1.12 ; v1(81.026,76.892) U2.13
U1_13: LED3.2 U1.13 U2.12 | length 57
  Top Layer w0.6: U1.13 75.779,67.397 83.325,67.397 88.455,72.527 88.455,74.217 86.637,76.034 v1(85.097,76.034)
  Bottom Layer w0.6: U1.13 68.58,60.198 68.58,55.6 70.593,53.586 71.509,53.586 LED3.2 ; U2.12 85.097,79.495 v1(85.097,76.034)
U1_14: LED4.2 U1.14 U2.11 | length 70.1
  Top Layer w0.6: v1(86.106,75.177) 86.359,75.177 87.542,73.994 87.542,72.75 82.992,68.2 74.042,68.2 U1.14 63.344,57.502 63.344,55.874 71.07,48.148 84.567,48.148 LED4.2
  Bottom Layer w0.6: v1(86.106,75.177) U2.11
U1_15: U1.15
U2_2: U2.2
U2_3: U2.3
U2_4: U2.4
U2_5: U2.5
U2_19: U2.19 U4.1 | length 50.3
  Top Layer w0.6: U2.19 68.247,78.565 87.511,78.565 95.039,71.037 95.039,63.988 101.981,57.046 U4.1
U4_2: U4.2
U4_3: U4.3
U4_4: U4.4
U6_2: U6.2

## Polygon pours and split planes (outlines as drawn)
GND on Bottom Layer (solid): 38.608,96.774 110.49,96.774 110.744,96.52 110.744,38.354 110.49,38.1 39.624,38.1 38.1,39.624
GND on Top Layer (solid): 39.37,96.52 110.49,96.52 110.744,96.266 110.744,40.132 110.236,39.624 40.132,39.624 39.37,38.862